# EAGLE board Passive Attn (EAGLE 7.7.0)
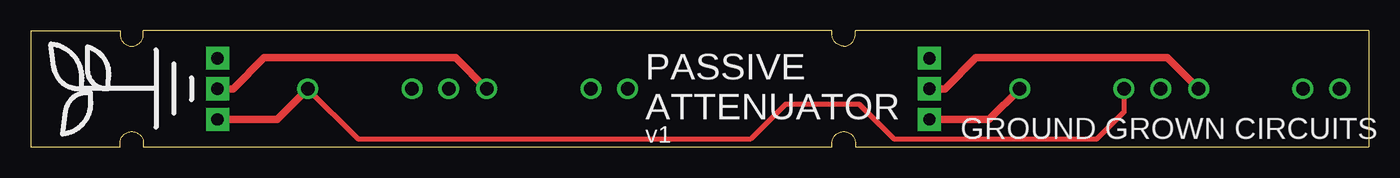
[diagram p0: board, top side]
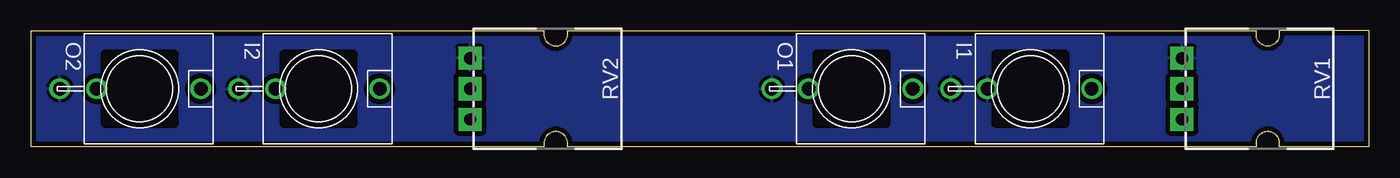
[diagram p1: board, bottom side, seen from below]

Size 109.22 x 9.53 mm. Coordinates in mm from the lower left corner, seen from the top.
Outline: 0,9.53 0,0 7.3,0 7.3,0.32 arc-90 8.26,1.27 arc-90 9.21,0.32 9.21,0 65.41,0 65.41,0.32 arc-90 66.36,1.27 arc-90 67.31,0.32 67.31,0 109.22,0 109.22,9.53 67.31,9.53 67.31,9.21 arc-90 66.36,8.26 arc-90 65.41,9.21 65.41,9.53 9.21,9.53 9.21,9.21 arc-90 8.26,8.26 arc-90 7.3,9.21 7.3,9.53 0,9.53
Copper layers (1*16): Top 0.035mm / dielectric 1.5mm / Bottom 0.035mm
Design rules "SparkFun": minimum track width 8mil, minimum drill 20mil, track to track 8mil, track to pad 8mil, pad to pad 8mil, via to via 8mil, smd to smd 8mil, copper to edge 8mil, drill to drill 8mil, minimum pad ring 12mil, minimum via ring 10mil, stop-mask expansion 4mil, vias tented up to drill 20mil, thermal gap 10mil

## Footprints (pad centres in the part's own frame; a part is rotated, then mirrored left to right if it is on the bottom)
WQP-PJ301M-12_JACK = drill 1.1: P$1 0,5; P$2 0,-3.5; P$3 0,-6.5
ALPS_POT_NO_CLIPS = drill 1 pad 1.88 square: P$1 7,-2.5; P$2 7,0; P$3 7,2.5

## Placement (x,y rotation side)
I1  WQP-PJ301M-12_JACK  [WQP-PJ301M-12_JACK]  27.62,4.76 270 bottom
I2  WQP-PJ301M-12_JACK  [WQP-PJ301M-12_JACK]  85.72,4.76 270 bottom
O1  WQP-PJ301M-12_JACK  [WQP-PJ301M-12_JACK]  42.23,4.76 270 bottom
O2  WQP-PJ301M-12_JACK  [WQP-PJ301M-12_JACK]  100.33,4.76 270 bottom
RV1  [ALPS_POT_NO_CLIPS]  8.26,4.76 180 bottom
RV2  [ALPS_POT_NO_CLIPS]  66.36,4.76 180 bottom
U$1  [LOGO_MED]  10.16,4.76 90 top

## Library data of the parts
I1 I2 O1 O2 = thonkiconn
RV1 RV2 = SparkFun-Electromechanical
U$1 = GroundGrownCircuits

## Nets
GND: I1.P$2 I1.P$3 I2.P$3 O1.P$3 O2.P$3 RV1.P$1 RV2.P$1
N$2: O1.P$1 RV1.P$2
N$3: I1.P$1 I2.P$2 RV1.P$3
N$4: O2.P$1 RV2.P$2
N$5: I2.P$1 RV2.P$3

## Tracks (layer width: path | path; a pad name or v marks a point on that pad's centre or on a via)
GND
  pour Bottom (isolate 0.406): 0,0 109.22,0 109.22,9.53 0,9.53
N$2
  Top 0.61: RV1.P$2 16.51,4.76 19.05,7.3 34.69,7.3 O1.P$1
N$3
  Top 0.406: I2.P$2 89.22,2.87 87,0.64 70.48,0.64 67.63,3.49 61.59,3.49 58.74,0.64 26.75,0.64 I1.P$1
  Top 0.61: RV1.P$3 20.12,2.26 I1.P$1
N$4
  Top 0.61: RV2.P$2 74.61,4.76 77.15,7.3 92.79,7.3 O2.P$1
N$5
  Top 0.61: RV2.P$3 78.22,2.26 I2.P$1

## Text on the board
tPlace: PASSIVE / ATTENUATOR | GROUND GROWN CIRCUITS | v1